# EAGLE board control-board (EAGLE 7.6.0)
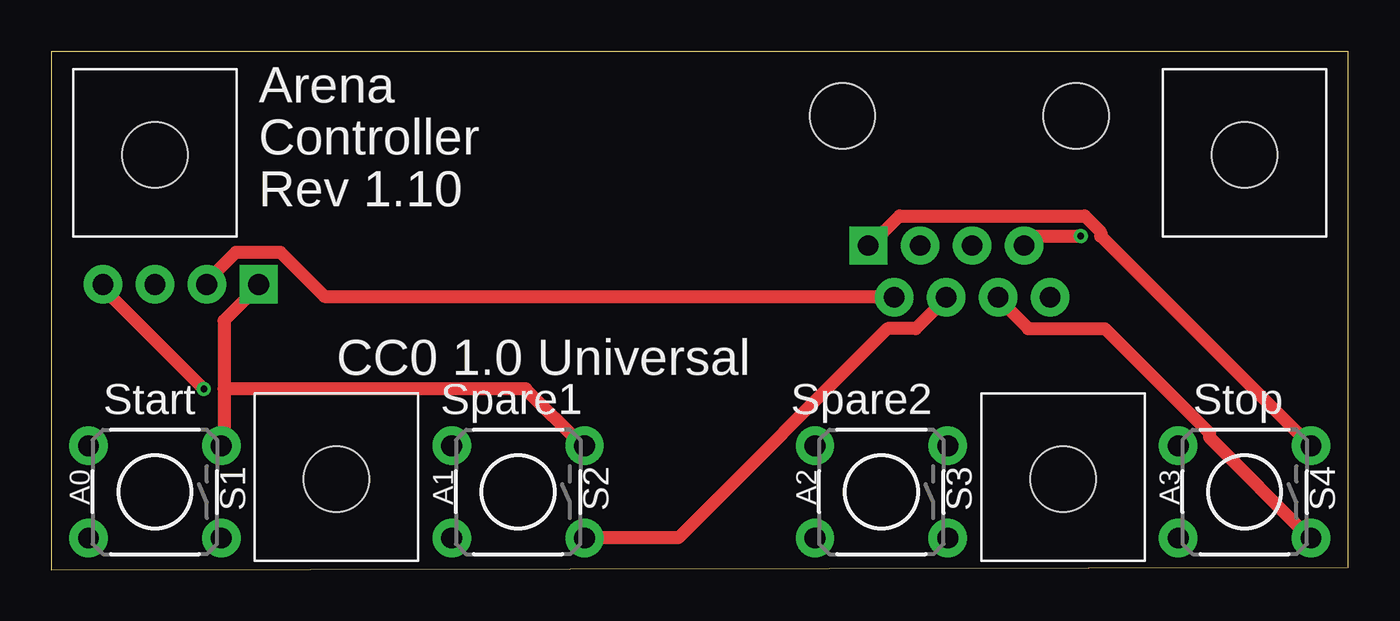
[diagram p0: board, top side]
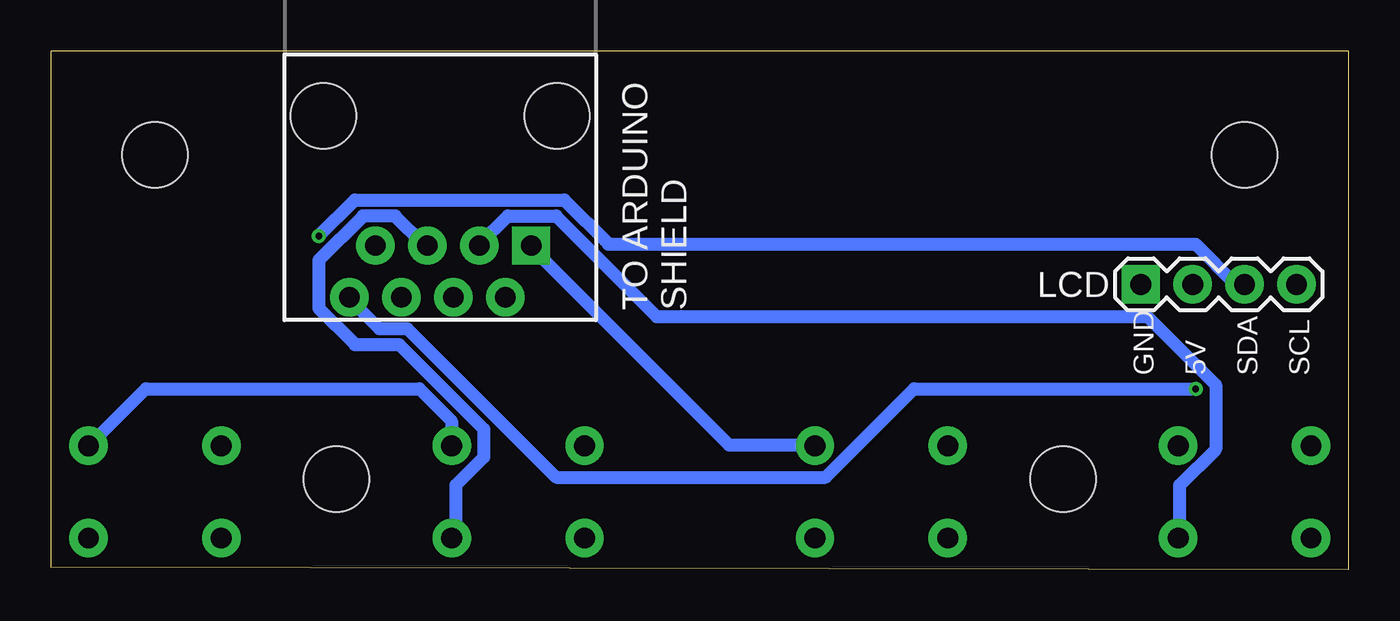
[diagram p1: board, bottom side, seen from below]

Size 63.5 x 25.4 mm. Coordinates in mm from the lower left corner, seen from the top.
Outline: 0,0 63.5,0.13 63.5,25.4 0,25.4 0,0
Copper layers (1*16): Top 0.0356mm / dielectric 1.5011mm / Bottom 0.0356mm
Design rules "LaenPCBOrder": minimum track width 6mil, minimum drill 13mil, track to track 6mil, track to pad 6mil, pad to pad 6mil, via to via 6mil, smd to smd 6mil, copper to edge 15mil, drill to drill 6mil, minimum pad ring 7mil, minimum via ring 7mil, stop-mask expansion 3mil, vias tented up to drill 0mil, thermal gap 10mil
Net classes: 0 default: width 0.635 mm; 1 power: width 0.635 mm

## Footprints (pad centres in the part's own frame; a part is rotated, then mirrored left to right if it is on the bottom)
1X04 = drill 1.016 pad 1.88 square: 1 0,0 | drill 1.016 pad 1.88: 2 2.54,0; 3 5.08,0; 4 7.62,0
RJ45-8 = drill 1 pad 1.88 square: 1 -4.445,6.35 | drill 1 pad 1.88: 2 -3.175,8.89; 3 -1.905,6.35; 4 -0.635,8.89; 5 0.635,6.35; 6 1.905,8.89; 7 3.175,6.35; 8 4.445,8.89 | hole 3.2: -5.715,0; 5.715,0
3.2-MOUNT = hole 3.2: 0,0
TACTILE-PTH = drill 1.016 pad 1.88: 1 -3.251,2.261; 2 3.251,2.261; 3 -3.251,-2.261; 4 3.251,-2.261

## Placement (x,y rotation side)
JP1  LCD  [1X04]  10.16,13.97 0 bottom
JP2  SHIELD  [RJ45-8]  44.45,22.23 180 bottom
MT1  3.2-MOUNT  [3.2-MOUNT]  58.42,20.32 0 top
MT2  3.2-MOUNT  [3.2-MOUNT]  49.53,4.45 0 top
MT3  3.2-MOUNT  [3.2-MOUNT]  13.97,4.45 0 top
MT4  3.2-MOUNT  [3.2-MOUNT]  5.08,20.32 0 top
S1  SWITCH-MOMENTARY-2PTH  [TACTILE-PTH]  5.08,3.81 180 top
S2  SWITCH-MOMENTARY-2PTH  [TACTILE-PTH]  22.86,3.81 180 top
S3  SWITCH-MOMENTARY-2PTH  [TACTILE-PTH]  40.64,3.81 180 top
S4  SWITCH-MOMENTARY-2PTH  [TACTILE-PTH]  58.42,3.81 180 top

## Library data of the parts
JP1 JP2 = SparkFun-Connectors
MT1-MT4 = PJS
S1-S4 = SparkFun-Electromechanical

## Nets
5V: JP1.2 JP2.2
A0: JP2.3 S1.1
A1: JP2.4 S2.1
A2: JP2.5 S3.1
A3: JP2.6 S4.1
A4-SDA: JP1.3 JP2.7
A5-SCL: JP1.4 JP2.8
GND [power]: JP1.1 JP2.1 S1.3 S2.3 S3.3 S4.3

## Tracks (layer width: path | path; a pad name or v marks a point on that pad's centre or on a via)
5V
  Top 0.635: JP2.2 41.14,13.39 13.39,13.39 11.22,15.55 9.05,15.55 7.48,13.98 JP1.2
A0
  Bottom 0.635: S1.1 8.27,1.57 8.27,4.13 6.5,5.91 6.5,9.05 9.84,12.4 33.86,12.4 38.78,17.32 41.14,17.32 42.52,15.95 JP2.3
A1
  Top 0.635: S2.1 26.18,1.57 30.71,1.57 40.95,11.81 42.32,11.81 43.7,13.19 JP2.4
A2
  Bottom 0.635: S3.1 43.7,1.57 43.7,4.13 42.32,5.51 42.32,6.89 46.46,11.02 48.62,11.02 50.39,12.79 50.39,15.16 48.23,17.32 46.65,17.32 45.28,15.95 JP2.5
A3
  Top 0.635: S4.1 61.61,1.57 56.69,6.5 56.69,6.69 51.58,11.81 47.84,11.81 46.46,13.19 JP2.6
A4-SDA  (via drill 0.33)
  Top 0.635: v50.39,16.34 48.03,16.34 47.64,15.95 JP2.7
  Bottom 0.635: v50.39,16.34 48.62,18.11 38.39,18.11 36.22,15.95 7.48,15.95 5.51,13.98 5.12,13.98 JP1.3
A5-SCL  (via drill 0.33)
  Top 0.635: v7.48,8.86 2.56,13.78 JP1.4
  Bottom 0.635: v7.48,8.86 21.26,8.86 25.59,4.53 38.78,4.53 46.06,11.81 47.44,11.81 48.82,13.19 JP2.8
GND
  Top 0.635: 8.46,8.86 8.46,12.21 10.04,13.78 JP1.1 | 8.46,8.86 8.46,6.1 S1.3 | 8.46,8.86 23.23,8.86 25.98,6.1 S2.3 | S4.3 61.61,6.1 51.38,16.34 51.38,16.54 50.59,17.32 41.53,17.32 40.16,15.95 JP2.1
  Bottom 0.635: S3.3 43.9,6.1 43.9,7.28 45.47,8.86 58.86,8.86 61.61,6.1 S4.3 | S2.3 26.18,6.1 30.32,6.1 39.96,15.75 JP2.1

## Text on the board
tNames: Arena | Controller | Rev 1.10 | CC0 1.0 Universal | Start | Spare1 | Spare2 | Stop | A0 | A1 | A2 | A3
bNames: SHIELD | TO ARDUINO | SCL | SDA | 5V | GND